# Altium PCB main.PcbDoc
Units mm, origin at the board's own origin, x right, y up, seen from the top; angles counter-clockwise.
Board outline 138 x 136 mm, 2 copper layers (Top Layer, Bottom Layer); 32 components, 34 nets, 230 pads, 21 vias.
Unrouted connection lines stored in the file: 1.
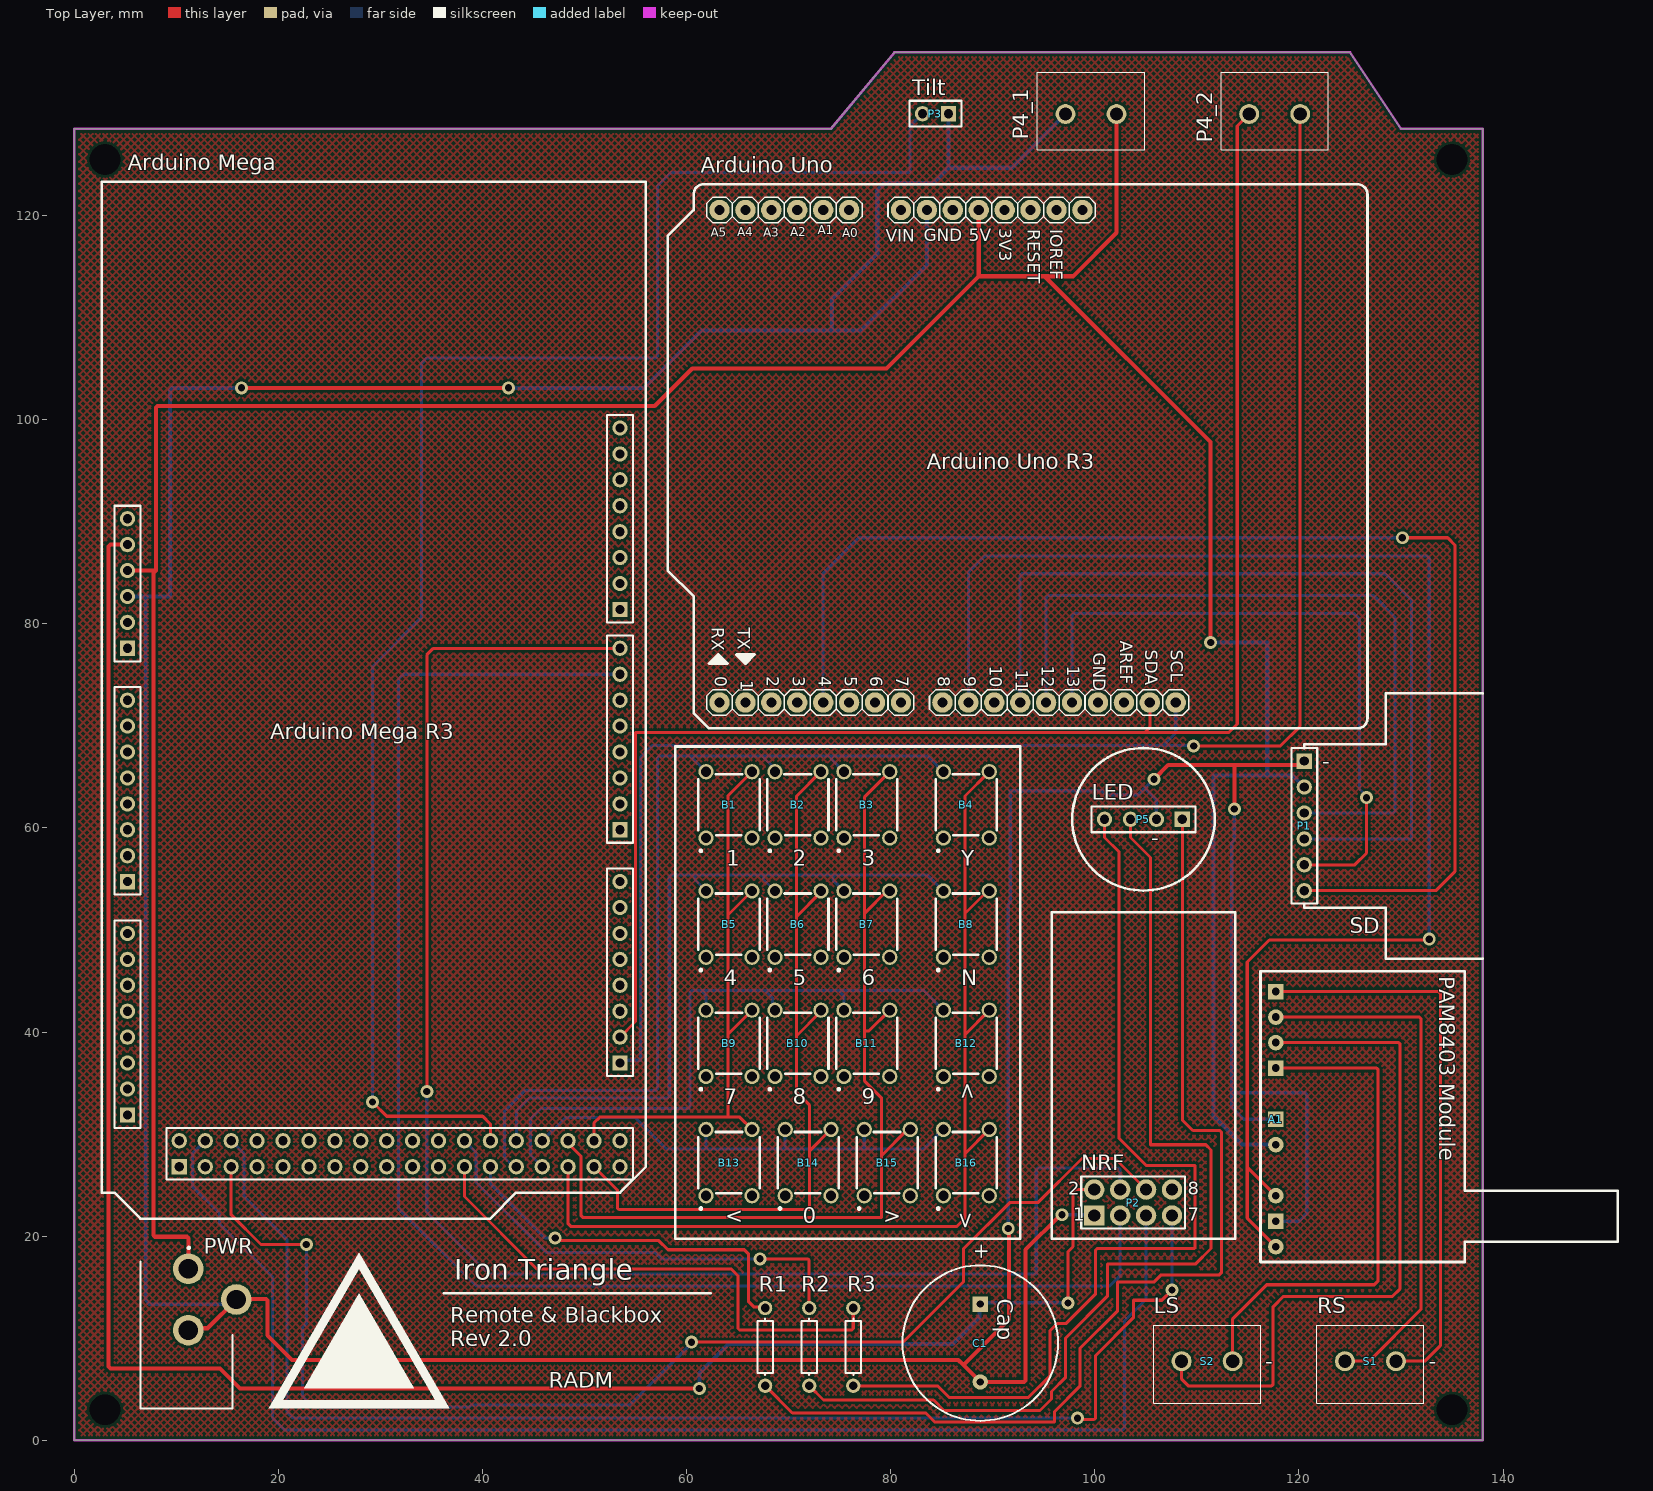
[diagram p0: Top Layer view]
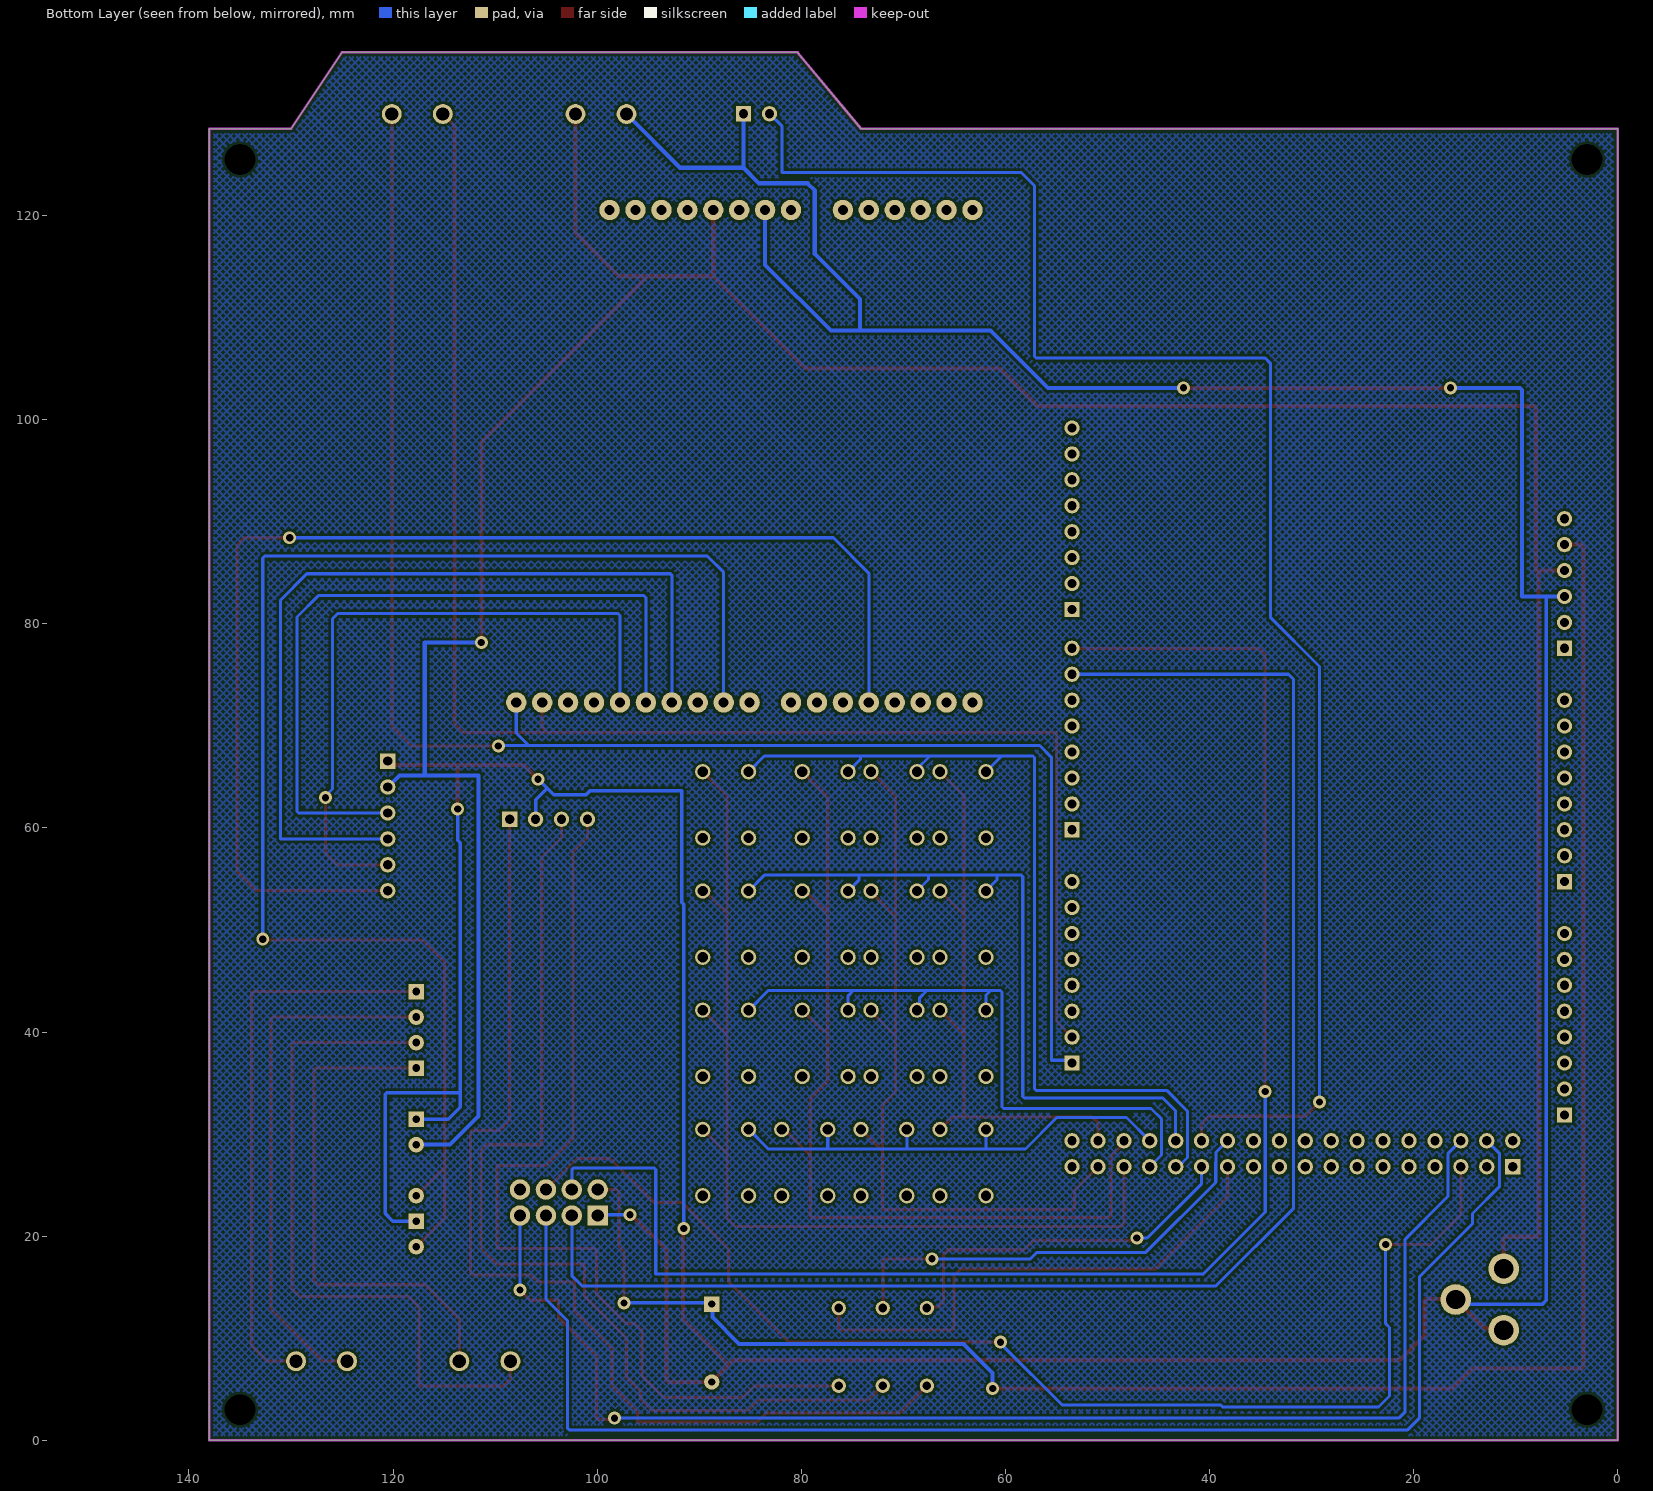
[diagram p1: Bottom Layer view, seen from below]

## Layer stack, top to bottom
Top Solder: solder mask 0.0102, Solder Resist, Dk 3.5
Top Layer: signal copper 0.0356
Dielectric 1: dielectric 0.32, FR-4, Dk 4.8
Bottom Layer: signal copper 0.0356
Bottom Solder: solder mask 0.0102, Solder Resist, Dk 3.5

## Board outline
0,0 0,128.5 74.115,128.5 80.363,136 125,136 130,128.5 138,128.5 138,0

## Design rules (kind name [scope] priority, off if disabled: settings)
Clearance [All] p1: gap=0.254 ignorepadtopadclearanceinfootprint=FALSE except(0: Arc-Hole Track-Hole SMDPad-Hole THPad-Hole Via-Hole Fill-Hole Poly-Hole Region-Hole Text-Hole)
PolygonConnect [All] p1: connectstyle=Relief reliefconductorwidth=0.254 reliefentries=4 polygonreliefangle="90 Angle" airgapwidth=0.254
RoutingVias [All] p1: holewidth=0.711 width=1.27 viastyle="Through Hole" minholewidth=0.711 minwidth=1.27 maxholewidth=0.711 maxwidth=1.27
SolderMaskExpansion [All] p1: expansion=0.102 istentingtop=FALSE
Width [All] p1: maxlimit=0.4 minlimit=0.254 preferedwidth=0.3
30 further rules are at their usual default settings.

## Components (designator, comment, footprint, x,y, rotation, side; value= is the part's Value field where it differs from the comment)
A1 "Speaker Amp" "HiLetgo PAM8403 Amp Module" 116.229,45.963 r270 top
"Arduino Mega" "ARDUINO MEGA" "ARDUINO MEGA" 30.607,69.98 r270 top
"Arduino Uno" "ARDUINO UNO" "ARDUINO UNO" 90.66,96.55 r180 top
B1 "Pushbutton" FSM4JH 64.151,62.262 r90 top
B2 "Pushbutton" FSM4JH 70.903,62.262 r90 top
B3 "Pushbutton" FSM4JH 77.655,62.262 r90 top
B4 "Pushbutton" FSM4JH 87.407,62.262 r90 top
B5 "Pushbutton" FSM4JH 64.151,50.578 r90 top
B6 "Pushbutton" FSM4JH 70.903,50.578 r90 top
B7 "Pushbutton" FSM4JH 77.655,50.578 r90 top
B8 "Pushbutton" FSM4JH 87.407,50.578 r90 top
B9 "Pushbutton" FSM4JH 64.151,38.894 r90 top
B10 "Pushbutton" FSM4JH 70.903,38.894 r90 top
B11 "Pushbutton" FSM4JH 77.655,38.894 r90 top
B12 "Pushbutton" FSM4JH 87.407,38.894 r90 top
B13 "Pushbutton" FSM4JH 64.151,27.21 r90 top
B14 "Pushbutton" FSM4JH 71.903,27.21 r90 top
B15 "Pushbutton" FSM4JH 79.655,27.21 r90 top
B16 "Pushbutton" FSM4JH 87.407,27.21 r90 top
C1 "" RB7.6-15 88.773,9.525 r90 top value=10uF
P1 "SD" HDR1X6 120.523,66.548 r270 top
P2 "NRF24L01" HDR2X4 99.937,22.022 r0 top
P3 "Tilt" HDR1X2 85.65,129.985 r180 top
P4_1 "LCD 1" TB00250002BE 97.122,129.95 r0 top
P4_2 "LCD 2" TB00250002BE 115.122,129.95 r0 top
P5 "RGB LED" HDR1X4 108.57,60.849 r180 top
PWR "DC PWR" PJ-102AH 15.476,13.795 r180 top
R1 "" AXIAL-0.3 67.691,9.144 r90 top value=230
R2 "" AXIAL-0.3 72.009,9.144 r270 top value=230
R3 "" AXIAL-0.3 76.327,9.144 r90 top value=230
S1 "Speaker Left" TB00250002BE 129.5,7.747 r180 top
S2 "Speaker Right" TB00250002BE 113.5,7.747 r180 top

## Footprints (in the part's own frame and the unit in brackets; to place one, negate y for a bottom-side part, rotate by r counter-clockwise, add the part's x,y. Pads: shape width x height; smd on the part's side, far side on the other; paste and mask are expansions set on the pad)
"ARDUINO MEGA" [mm] "Arduino Mega 2560"
  rect 1.5x1.5 hole 0.9: 0(10.16,22.86) 8(-11.43,22.86) 21(33.02,22.86) 59(-7.62,-25.4) 67(15.24,-25.4) 75(38.1,-25.4) 79(43.18,-20.32)
  round 1.5 hole 0.9: 1(7.62,22.86) 2(5.08,22.86) 3(2.54,22.86) 4(0,22.86) 5(-2.54,22.86) 6(-5.08,22.86) 7(-7.62,22.86) 9(-13.97,22.86) 10(-16.51,22.86) 11(-19.05,22.86) 12(-21.59,22.86) 13(-24.13,22.86) 14(15.24,22.86) 15(17.78,22.86) 16(20.32,22.86) 17(22.86,22.86) 18(25.4,22.86) 19(27.94,22.86) 20(30.48,22.86) 22(40.64,20.32) 23(43.18,20.32) 24(40.64,17.78) 25(43.18,17.78) 26(40.64,15.24) 27(43.18,15.24) 28(40.64,12.7) 29(43.18,12.7) 30(40.64,10.16) 31(43.18,10.16) 32(40.64,7.62) 33(43.18,7.62) 34(40.64,5.08) 35(43.18,5.08) 36(40.64,2.54) 37(43.18,2.54) 38(40.64,0) 39(43.18,0) 40(40.64,-2.54) 41(43.18,-2.54) 42(40.64,-5.08) 43(43.18,-5.08) 44(40.64,-7.62) 45(43.18,-7.62) 46(40.64,-10.16) 47(43.18,-10.16) 48(40.64,-12.7) 49(43.18,-12.7) 50(40.64,-15.24) 51(43.18,-15.24) 52(40.64,-17.78) 53(43.18,-17.78) 54(-20.32,-25.4) 55(-17.78,-25.4) 56(-15.24,-25.4) 57(-12.7,-25.4) 58(-10.16,-25.4) 60(-2.54,-25.4) 61(0,-25.4) 62(2.54,-25.4) 63(5.08,-25.4) 64(7.62,-25.4) 65(10.16,-25.4) 66(12.7,-25.4) 68(20.32,-25.4) 69(22.86,-25.4) 70(25.4,-25.4) 71(27.94,-25.4) 72(30.48,-25.4) 73(33.02,-25.4) 74(35.56,-25.4) 76(-26.67,22.86) 77(-29.21,22.86) 78(40.64,-20.32) 80(43.18,22.86) 81(40.64,22.86)
  silkscreen extent -53.34,-27.94 48.26,25.4
"ARDUINO UNO" [mm]
  round 2 hole 1: 0(27.44,24.26) 1(24.9,24.26) 2(22.36,24.26) 3(19.82,24.26) 3.3V(-0.5,-24) 4(17.28,24.26) 5(14.74,24.26) 5V(2.04,-24) 6(12.2,24.26) 7(9.66,24.26) 8(5.596,24.26) 9(3.056,24.26) 10(0.516,24.26) 11(-2.024,24.26) 12(-4.564,24.26) 13(-7.104,24.26) A0(14.74,-24) A1(17.28,-24) A2(19.82,-24) A3(22.36,-24) A4(24.9,-24) A5(27.44,-24) AREF(-12.184,24.26) GND1(7.12,-24) GND2(4.58,-24) GND3(-9.644,24.26) IOREF(-5.58,-24) NC(-8.12,-24) RST(-3.04,-24) SCL(-17.264,24.26) SDA(-14.724,24.26) Vin(9.66,-24)
  silkscreen extent -36.06,-26.54 32.52,26.8
AXIAL-0.3 [mm] "Axial Device, Thru-Hole; 2 Leads; 0.3 in Pin Spacing"
  round 1.4 hole 0.85: 1(-3.81,0) 2(3.81,0)
  silkscreen extent -2.77,-0.76 2.77,0.76
FSM4JH [mm]
  round 1.5 hole 1: 1(-3.25,2.25) 2(3.25,2.25) 3(-3.25,-2.25) 4(3.25,-2.25)
  silkscreen extent -4.6,-3 3,3, body extent -3.82,-3 3.98,3, height 7.61
HDR1X2 [mm] "Connector; Header; 2 Position"
  rect 1.5x1.5 hole 0.9: 1(0,0)
  round 1.5 hole 0.9: 2(2.54,0)
  silkscreen extent -1.27,-1.27 3.81,1.27
HDR1X4 [mm] "Connector; Header; 4 Position"
  rect 1.5x1.5 hole 0.9: 1(0,0)
  round 1.5 hole 0.9: 2(2.54,0) 3(5.08,0) 4(7.62,0)
  silkscreen extent -1.27,-1.27 8.89,1.27
HDR1X6 [mm] "Connector; Header; 6 Position"
  rect 1.5x1.5 hole 0.9: 1(0,0)
  round 1.5 hole 0.9: 2(2.54,0) 3(5.08,0) 4(7.62,0) 5(10.16,0) 6(12.7,0)
  silkscreen extent -1.27,-1.27 13.97,1.27
HDR2X4 [mm] "Connector; Header; 4x2 Position"
  rect 2x2 hole 1.2: 1(0,0)
  round 2 hole 1.2: 2(0,2.54) 3(2.54,0) 4(2.54,2.54) 5(5.08,0) 6(5.08,2.54) 7(7.62,0) 8(7.62,2.54)
  silkscreen extent -1.27,-1.27 8.89,3.81
"HiLetgo PAM8403 Amp Module" [mil] "https://www.amazon.com/dp/B01DKAI51M?psc=1&smid=A30QSGOJR8LMXA&ref_=chk_typ_imgToDp"
  rect 60x60 hole 30: 1(78.74,59.06) 4(374.01,59.06) 5(570.87,59.06) 8(964.57,59.06)
  round 60 hole 30: 2(177.16,59.06) 3(275.59,59.06) 6(669.29,59.06) 7(866.14,59.06) 9(1062.99,59.06)
  silkscreen extent 0,0 1122,1378
PJ-102AH [mm]
  round 3 hole 1.9: 1(4.3,-3) 2(4.3,3) 3(-0.4,0)
  silkscreen extent 0,-5.17 9,10.7, body extent -0.68,-3.7 8.72,10.7, height 11.04
RB7.6-15 [mm] "Polarized Capacitor (Radial); 2 Leads"
  rect 1.5x1.5 hole 0.7: 1(3.81,0)
  round 1.5 hole 0.7: 2(-3.81,0)
  silkscreen extent -7.62,-7.62 7.62,7.62
TB00250002BE [mm]
  round 1.95 hole 1.3: 1(0,0) 2(5,0)
  silkscreen extent -2.75,-3.5 7.75,4.1, body extent -2.51,-4.08 7.99,3.52, height 9.99

## Part data
A1: library part "HiLetgo PAM8403 Module", "https://www.amazon.com/dp/B01DKAI51M?psc=1&smid=A30QSGOJR8LMXA&ref_=chk_typ_imgToDp"
B1 B2 B3 B4 B5 B6 B7 B8 B9 B10 B11 B12 B13 B14 B15 B16: library part FSM2JAH, "Tactile Pushbutton", Manufacturer_Name="TE Connectivity", Mouser Part Number=506-FSM2JAH, Datasheet Link=http://www.te.com/commerce/DocumentDelivery/DDEController?Action=showdoc&DocId=Customer+Drawing%7F1825910%7FC9%7Fpdf%7FEnglish%7FENG_CD_1825910_C9.pdf%7F1825910-3, Manufacturer_Part_Number=FSM2JAH, Mouser Price/Stock=https://www.mouser.co.uk/ProductDetail/TE-Connectivity-PB/FSM2JAH?qs=Of7OaoM7rsH02ckr%252BGLHNA%3D%3D
C1: library part "Cap Pol1", "Polarized Capacitor (Radial)", LatestRevisionDate=17-Jul-2002, LatestRevisionNote="Re-released for DXP Platform.", PackageDescription="Polarized Capacitor (Radial); 2 Leads", PackageReference=RB7.6-15, Published=8-Jun-2000, Publisher="Altium Limited"
P1: library part "Header 6", "Header, 6-Pin", LatestRevisionDate=17-Jul-2002, LatestRevisionNote="Re-released for DXP Platform.", Publisher="Altium Limited"
P2: library part "Header 4X2", "Header, 4-Pin, Dual row", LatestRevisionDate=17-Jul-2002, LatestRevisionNote="Re-released for DXP Platform.", Publisher="Altium Limited"
P3: library part "Header 2", "Header, 2-Pin", LatestRevisionDate=17-Jul-2002, LatestRevisionNote="Re-released for DXP Platform.", Publisher="Altium Limited"
P4_1 P4_2 S1 S2: library part TB002-500-02BE, "Connector", Manufacturer_Name="CUI Devices", Mouser Part Number=490-TB002-500-02BE, Arrow Part Number=TB002-500-02BE, Arrow Price/Stock=https://www.arrow.com/en/products/tb002-500-02be/cui-devices?region=nac, Datasheet Link=https://eu.mouser.com/datasheet/2/670/tb002_500-1550579.pdf, Height=10.4mm, Manufacturer_Part_Number=TB002-500-02BE, Mouser Price/Stock=https://www.mouser.co.uk/ProductDetail/CUI-Devices/TB002-500-02BE?qs=vLWxofP3U2x9716kcgva%2Fw%3D%3D
P5: library part "Header 4", "Header, 4-Pin", LatestRevisionDate=17-Jul-2002, LatestRevisionNote="Re-released for DXP Platform.", Publisher="Altium Limited"
PWR: library part PJ-102A, "DC Power Plug", Manufacturer_Name="CUI Devices", Mouser Part Number=490-PJ-102A, Arrow Part Number=PJ-102A, Arrow Price/Stock=https://www.arrow.com/en/products/pj-102a/cui-devices?region=nac, Datasheet Link=https://www.cui.com/product/resource/pj-102a.pdf, Manufacturer_Part_Number=PJ-102A, Mouser Price/Stock=https://www.mouser.co.uk/ProductDetail/CUI-Devices/PJ-102A?qs=WyjlAZoYn50UKjtnxOz%252Bqg%3D%3D
R1 R2 R3: library part Res1, "230ohm", LatestRevisionDate=17-Jul-2002, LatestRevisionNote="Re-released for DXP Platform.", PackageDescription="Axial Device, Thru-Hole; 2 Leads; 0.3 in Pin Spacing", PackageReference=AXIAL-0.3, Published=8-Jun-2000, Publisher="Altium Limited"

## Free pads (board coordinates)
  round 2 hole 3: 18(3,3)
  round 1.524 hole 3: 19(3,125.5) 20(135,125.5) 21(135,3)

## Via types
v1: diameter 1.27, hole 0.711, Top Layer to Bottom Layer, 21 vias

## Nets (pads, with @x,y where several pads share a name; then routed paths per layer and width w, separated by ;. In a path a pad name is that pad's centre, name@x,y a point inside that pad or via, vN(x,y) a via of type N, cw(c..) or ccw(c..) an arc to the next point about the centre after c; other vN are vias at no path point)
+3V3: "Arduino Mega.55" C1.1 P2.2 | length 195.7
  Top Layer w0.3: v1(97.37,13.455) 97.37,18.48 97.858,18.968 97.858,24.318 98.102,24.562 P2.2
  Top Layer w0.4: 5.207,87.76 3.536,87.76 3.36,87.584 3.36,7.211 3.536,7.035 14.275,7.035 16.25,5.06 v1(61.24,5.06) ; v1(97.37,13.455) v1@97.529,13.455
  Bottom Layer w0.3: C1.1@88.7,13.262 C1.1
  Bottom Layer w0.35: C1.1 88.893,13.455 v1(97.37,13.455)
  Bottom Layer w0.4: v1(61.24,5.06) 61.24,6.61 64.08,9.45 86.095,9.45 88.7,12.055 C1.1@88.7,13.262
+5V: "Arduino Mega.56" "Arduino Uno.5V" A1.6 P1.2 P4_1.2 PWR.1 | length 321.1
  Top Layer w0.3: 7.979,85.22 8.001,85.242
  Top Layer w0.4: 5.207,85.22 7.979,85.22 7.747,84.988 7.747,20.088 7.896,19.939 11.027,19.939 11.176,19.79 PWR.1 ; 8.001,85.242 8.001,101.197 8.15,101.346 56.874,101.346 60.548,105.02 79.585,105.02 88.62,114.055 ; 88.62,120.55 88.62,114.055 ; P4_1.2 102.122,118.322 97.855,114.055 95.09,114.055 ; v1(111.345,78.165) 111.345,97.8 95.09,114.055 ; 88.62,114.055 95.09,114.055
  Bottom Layer w0.4: v1(111.345,78.165) 116.895,78.165 116.895,65.151 ; A1.6 114.42,28.963 111.633,31.75 111.633,65.151 116.895,65.151 ; P1.2 119.38,65.151 116.895,65.151
column1: "Arduino Mega.22" B1.4 B5.4 B9.4 B13.4 | length 59.4
  Top Layer w0.3: 50.927,29.34 50.927,31.102 51.485,31.66 64.045,31.66 ; B13.4 65.201,31.66 64.045,31.66 ; B9.4 64.117,39.86 64.045,39.86 ; B5.4 64.045,51.472 ; B1.4 64.045,63.156 64.045,51.472 ; 64.045,31.66 64.045,39.86 ; 64.045,39.86 64.045,51.472
column2: "Arduino Mega.23" B2.4 B6.4 B10.4 B14.4 | length 78.3
  Top Layer w0.3: 50.927,26.8 53.213,24.514 53.213,22.755 53.362,22.606 72.025,22.606 72.025,28.332 ; B10.4 73.153,42.008 70.76,39.615 ; B6.4 73.153,53.703 70.76,51.31 ; B2.4 70.76,63.119 70.76,51.31 ; B14.4 72.025,28.332 ; 70.76,39.615 70.76,51.31 ; 70.76,39.615 70.76,34.13 72.025,32.865 72.025,28.332
column3: "Arduino Mega.24" B3.4 B7.4 B11.4 B15.4 | length 93.3
  Top Layer w0.3: 48.387,29.34 48.387,29.083 49.657,27.813 49.657,21.993 49.806,21.844 79.11,21.844 79.11,27.895 ; B11.4 77.876,40.115 77.445,40.115 ; B7.4 79.618,53.828 77.445,51.655 ; B3.4 77.445,63.052 77.445,51.655 ; B15.4 81.675,30.46 79.11,27.895 ; 77.445,40.115 77.445,51.655 ; 77.445,40.115 77.445,35.185 79.11,33.52 79.11,27.895
column4: "Arduino Mega.25" B4.4 B8.4 B12.4 B16.4 | length 99.7
  Top Layer w0.3: 48.387,26.8 48.387,21.209 48.641,20.955 86.487,20.955 87.271,21.739 87.271,28.105 ; B16.4 87.302,28.105 87.271,28.105 ; B12.4 89.657,42.121 87.271,39.735 ; B8.4 89.479,53.828 87.271,51.62 ; B4.4 87.271,63.126 87.271,51.62 ; 87.271,28.105 87.271,39.735 ; 87.271,39.735 87.271,51.62
GND: "Arduino Mega.57" "Arduino Mega.58" "Arduino Uno.GND1" A1.5 A1.8 C1.2 P1.1 P2.1 P3.1 P4_1.1 P5.2 PWR.2 PWR.3 | length 491.9
  Top Layer w0.3: PWR.2 PWR.2@11.357,10.976 ; PWR.3 PWR.3@15.924,13.843
  Top Layer w0.4: PWR.2@11.357,10.976 13.057,10.976 PWR.3 ; PWR.3@15.924,13.843 18.774,13.843 18.923,13.694 18.923,10.287 21.336,7.874 86.614,7.874 87.122,7.366 ; v1(16.383,103.124) v1(42.545,103.124) ; v1(91.515,20.76) 91.567,20.708 91.567,11.811 87.122,7.366 ; v1@96.571,22.022 93.218,18.669 93.218,5.864 93.069,5.715 C1.2 87.122,7.366 ; v1(105.791,64.77) 107.188,66.167 113.665,66.167 ; v1(113.665,61.849) 113.665,66.167 ; P1.1 120.142,66.167 113.665,66.167
  Bottom Layer w0.3: 6.836,82.68 6.839,82.677 ; PWR.3@15.416,13.335 PWR.3 ; 91.686,52.697 91.694,52.705 ; P2.1@99.861,22.098 P2.1
  Bottom Layer w0.35: 6.985,82.531 6.985,13.716 7.366,13.335 PWR.3@15.416,13.335 ; v1(91.515,20.76) 91.515,52.526 91.686,52.697 ; 91.694,52.705 91.694,63.627 100.712,63.627 101.093,63.247 104.268,63.247 104.902,63.881 ; v1(96.774,22.098) P2.1@99.861,22.098 ; v1(105.791,64.77) 104.902,63.881 ; P5.2 106.03,62.753 104.902,63.881 ; v1(113.665,61.849) 113.665,58.801 113.411,58.547 113.411,34.036 ; A1.8 120.015,21.463 120.777,22.225 120.777,33.887 120.628,34.036 113.411,34.036 ; A1.5 114.587,31.463 113.411,32.639 113.411,34.036
  Bottom Layer w0.4: 5.207,82.68 6.836,82.68 ; 6.839,82.677 9.385,82.677 9.385,102.919 9.59,103.124 v1(16.383,103.124) ; v1(42.545,103.124) 55.824,103.124 61.44,108.74 74.23,108.74 ; 83.54,120.55 83.54,115.18 77.1,108.74 74.23,108.74 ; P3.1 85.65,124.69 ; P4_1.1 91.862,124.69 85.65,124.69 ; 74.23,108.74 74.23,111.81 78.675,116.255 78.675,122.48 79.365,123.17 84.13,123.17 85.65,124.69
L_Out_+: A1.3 S2.2 | length 68.1
  Top Layer w0.3: S2.2 108.5,5.982 109.148,5.334 117.326,5.334 117.475,5.483 117.475,13.081 118.491,14.097 129.159,14.097 129.921,14.859 129.921,38.814 129.772,38.963 A1.3
L_Out_-: A1.4 S2.1 | length 50.7
  Top Layer w0.3: S2.1 113.5,11.9 116.84,15.24 127.381,15.24 127.762,15.621 127.762,36.314 127.613,36.463 A1.4
NetP5_1: P5.1 R1.1 | length 104.2
  Top Layer w0.3: R1.1 70.358,2.667 83.439,2.667 84.328,1.778 96.066,1.778 96.066,2.823 98.529,5.286 98.529,8.982 102.235,12.688 102.235,15.496 105.782,15.496 106.491,16.206 112.201,16.206 112.395,16.4 112.395,30.204 112.246,30.353 109.601,30.353 108.57,31.384 P5.1
NetP5_3: P5.3 R2.2 | length 100
  Top Layer w0.3: R2.2 73.406,3.937 84.201,3.937 85.217,2.921 94.632,2.921 95.758,4.047 95.758,4.779 97.14,6.161 97.14,10.018 101.219,14.097 101.219,17.252 109.835,17.252 111.379,18.796 111.379,28.448 110.871,28.956 105.445,28.956 105.445,57.104 103.49,59.059 P5.3
NetP5_4: P5.4 R3.1 | length 93.6
  Top Layer w0.3: R3.1 84.582,5.334 85.725,4.191 93.472,4.191 95.616,6.335 95.616,10.752 96.294,11.43 97.155,11.43 100.076,14.351 100.076,18.647 100.225,18.796 109.758,18.796 109.822,18.86 109.822,26.924 105.029,26.924 102.385,29.568 102.385,57.635 100.95,59.07 P5.4
NRF_CE: "Arduino Mega.6" P2.3 | length 154
  Bottom Layer w0.3: 53.467,75.06 32.261,75.06 31.75,74.549 31.761,74.538 31.761,26.281 31.75,26.27 31.75,22.733 39.37,15.113 101.473,15.113 102.477,16.117 P2.3
NRF_CSN: "Arduino Mega.7" P2.4 | length 156.6
  Top Layer w0.3: v1(34.544,34.163) 34.544,76.962 35.182,77.6 53.467,77.6
  Bottom Layer w0.3: v1(34.544,34.163) 34.533,34.152 34.533,22.363 40.64,16.256 40.688,16.304 94.257,16.304 94.257,26.516 94.433,26.692 102.301,26.692 102.477,26.516 P2.4
NRF_MISO: "Arduino Mega.50" P2.7 | length 132.8
  Top Layer w0.3: v1@98.425,2.032 99.927,2.032 100.076,2.181 100.076,8.299 103.772,11.995 103.772,13.716 106.553,13.716 v1(107.557,14.72)
  Bottom Layer w0.3: 15.367,29.34 16.637,28.07 16.637,23.876 20.828,19.685 20.828,2.794 21.463,2.159 v1(98.298,2.159) ; v1(107.557,14.72) P2.7
NRF_MOSI: "Arduino Mega.51" P2.6 | length 124.3
  Top Layer w0.3: 15.367,26.8 15.367,22.098 18.288,19.177 v1(22.733,19.177) ; v1(60.48,9.61) 81.205,9.61 87.145,15.55 87.145,18.785 91.645,23.285 94.415,23.285 98.74,27.61 101.969,27.61 P2.6
  Bottom Layer w0.3: v1(22.733,19.177) 22.733,11.43 22.352,11.049 22.352,4.343 23.44,3.255 38.709,3.255 38.919,3.465 54.45,3.465 v1@60.305,9.32
NRF_SCK: "Arduino Mega.52" P2.5 | length 136.7
  Bottom Layer w0.3: 12.827,29.34 12.74,29.34 12.74,29.253 11.56,28.073 11.56,24.889 14.224,22.225 14.224,21.209 19.431,16.002 19.431,2.159 20.574,1.016 102.74,1.016 102.916,1.192 102.916,11.729 105.017,13.83 P2.5
R_Out_+: A1.2 S1.2 | length 52.3
  Top Layer w0.3: A1.2 131.804,41.463 131.953,41.314 131.953,12.827 126.873,7.747 S1.2
R_Out_-: A1.1 S1.1 | length 55.7
  Top Layer w0.3: A1.1 133.709,43.963 133.858,43.814 133.858,9.271 132.334,7.747 S1.1
RGB_BLUE: "Arduino Mega.33" R3.2 | length 51.6
  Top Layer w0.3: 38.227,26.8 38.227,23.876 45.339,16.764 64.389,16.764 65.024,16.129 65.024,10.944 65.173,10.795 76.178,10.795 76.327,10.944 R3.2
RGB_GREEN: "Arduino Mega.32" R2.1 | length 45
  Top Layer w0.3: v1(67.183,17.78) 71.86,17.78 72.009,17.631 R2.1
  Bottom Layer w0.3: 38.227,29.34 39.358,28.209 39.358,27.301 39.381,27.278 39.381,25.308 39.358,25.285 46.228,18.415 56.896,18.415 57.531,17.78 v1(67.183,17.78)
RGB_RED: "Arduino Mega.31" R1.2 | length 36.5
  Top Layer w0.3: v1@46.863,19.558 57.277,19.558 58.166,18.669 65.659,18.669 66.04,18.288 66.04,13.611 66.61,13.041 67.604,13.041 R1.2
  Bottom Layer w0.3: 40.767,26.8 40.767,25.146 46.101,19.812 v1(47.117,19.812)
row1: "Arduino Mega.26" B13.2 B14.2 B15.2 B16.2 | length 48.1
  Bottom Layer w0.3: 45.847,29.34 48.13,31.623 54.952,31.623 58.03,28.545 61.855,28.545 ; B13.2 61.901,28.591 61.855,28.545 ; B14.2 69.653,28.552 69.66,28.545 ; B15.2 77.405,28.585 77.365,28.545 ; B16.2 83.242,28.545 77.365,28.545 ; 61.855,28.545 69.66,28.545 ; 69.66,28.545 77.365,28.545
row2: "Arduino Mega.27" B9.2 B10.2 B11.2 B12.2 | length 64.8
  Bottom Layer w0.3: 45.847,26.8 44.693,27.954 44.693,30.174 44.704,30.185 44.704,31.496 45.72,32.512 60.176,32.512 60.325,32.661 60.325,43.92 60.474,44.069 61.445,44.069 ; B9.2 61.901,43.613 61.445,44.069 ; B10.2 68.423,42.374 68.423,43.322 67.677,44.069 ; B11.2 75.405,43.544 74.88,44.069 ; B12.2 83.232,44.069 74.88,44.069 ; 61.445,44.069 67.677,44.069 ; 67.677,44.069 74.88,44.069
row3: "Arduino Mega.28" B5.2 B6.2 B7.2 B8.2 | length 73.6
  Bottom Layer w0.3: 43.307,29.34 43.307,32.258 44.577,33.528 58.144,33.528 58.293,33.677 58.293,55.223 58.442,55.372 60.81,55.372 ; B5.2 60.81,54.919 60.81,55.372 ; B6.2 67.535,54.946 67.535,55.372 ; B7.2 74.355,54.878 74.355,55.372 ; B8.2 83.613,55.372 74.355,55.372 ; 60.81,55.372 67.535,55.372 ; 67.535,55.372 74.355,55.372
row4: "Arduino Mega.29" B1.2 B2.2 B3.2 B4.2 | length 89.5
  Bottom Layer w0.3: 43.307,26.8 43.05,26.8 42.142,27.708 42.142,32.236 44.196,34.29 57.001,34.29 57.15,34.439 57.15,66.907 57.299,67.056 60.357,67.056 ; B1.2 60.357,67.056 ; B2.2 68.653,65.788 67.385,67.056 ; B3.2 74.215,66.702 74.215,67.056 ; B4.2 83.613,67.056 74.215,67.056 ; 60.357,67.056 67.385,67.056 ; 67.385,67.056 74.215,67.056
SCL: "Arduino Mega.21" "Arduino Uno.SCL" P4_2.2 | length 162.6
  Top Layer w0.3: v1(109.68,68.035) 118.18,68.035 120.122,69.977 P4_2.2 P4_2.2@120.122,130.068
  Bottom Layer w0.3: 53.467,36.96 53.74,37.233 55.499,37.233 55.499,66.929 56.642,68.072 106.697,68.072 ; 107.924,72.29 107.924,69.299 106.697,68.072 ; v1(109.68,68.035) 109.643,68.072 106.697,68.072
SD_CS: "Arduino Uno.4" P1.6 | length 123.9
  Top Layer w0.3: P1.6 133.418,53.848 135.28,55.71 135.28,87.73 134.575,88.435 v1(130.13,88.435)
  Bottom Layer w0.3: 73.38,72.29 73.38,84.97 76.845,88.435 v1(130.13,88.435)
SD_MISO: "Arduino Uno.12" P1.3 | length 73.4
  Bottom Layer w0.3: 95.224,72.29 95.224,82.583 95.4,82.759 127.321,82.759 129.413,80.667 129.413,61.617 129.264,61.468 P1.3
SD_MOSI: "Arduino Uno.11" P1.4 | length 85.8
  Bottom Layer w0.3: 92.684,72.29 92.684,84.761 92.833,84.91 128.44,84.91 131.015,82.335 131.015,58.928 P1.4
SD_SCK: "Arduino Uno.13" P1.5 | length 66.8
  Top Layer w0.3: P1.5 125.476,56.388 126.619,57.531 126.615,57.535 v1(126.615,62.97)
  Bottom Layer w0.3: 97.764,72.29 97.764,80.815 97.94,80.991 125.433,80.991 125.931,80.493 125.931,63.821 126.615,63.137 v1(126.615,62.97)
SDA: "Arduino Mega.20" "Arduino Uno.SDA" P4_2.1 | length 153.2
  Top Layer w0.3: 53.467,39.5 54.991,41.024 54.991,69.342 104.872,69.342 ; 105.384,72.29 105.384,69.854 104.872,69.342 ; P4_2.1 113.951,128.779 113.951,70.189 113.104,69.342 104.872,69.342
SPEAKER: "Arduino Uno.9" A1.7 A1.9 | length 147.9
  Top Layer w0.3: A1.9 114.935,21.757 114.935,26.757 ; A1.7 114.935,26.757 ; v1@132.842,49.171 v1(132.768,49.096) 132.693,49.022 117.094,49.022 114.935,46.863 114.935,26.757
  Bottom Layer w0.3: 87.604,72.29 87.604,85.049 89.182,86.627 132.592,86.627 132.768,86.452 v1(132.768,49.096)
Tilt: "Arduino Mega.30" P3.2 | length 160.2
  Top Layer w0.3: v1(29.21,33.147) 30.607,31.75 40.005,31.75 40.767,30.988 40.767,29.34
  Bottom Layer w0.3: v1(29.21,33.147) 29.21,75.819 34.036,80.645 34.036,105.537 34.544,106.045 57.001,106.045 57.15,106.194 57.15,122.936 58.42,124.206 81.87,124.206 81.87,128.745 P3.2
pads on no net: "Arduino Mega.0" "Arduino Mega.1" "Arduino Mega.2" "Arduino Mega.3" "Arduino Mega.4" "Arduino Mega.5" "Arduino Mega.8" "Arduino Mega.9" "Arduino Mega.10" "Arduino Mega.11" "Arduino Mega.12" "Arduino Mega.13" "Arduino Mega.14" "Arduino Mega.15" "Arduino Mega.16" "Arduino Mega.17" "Arduino Mega.18" "Arduino Mega.19" "Arduino Mega.34" "Arduino Mega.35" "Arduino Mega.36" "Arduino Mega.37" "Arduino Mega.38" "Arduino Mega.39" "Arduino Mega.40" "Arduino Mega.41" "Arduino Mega.42" "Arduino Mega.43" "Arduino Mega.44" "Arduino Mega.45" "Arduino Mega.46" "Arduino Mega.47" "Arduino Mega.48" "Arduino Mega.49" "Arduino Mega.53" "Arduino Mega.54" "Arduino Mega.59" "Arduino Mega.60" "Arduino Mega.61" "Arduino Mega.62" "Arduino Mega.63" "Arduino Mega.64" "Arduino Mega.65" "Arduino Mega.66" "Arduino Mega.67" "Arduino Mega.68" "Arduino Mega.69" "Arduino Mega.70" "Arduino Mega.71" "Arduino Mega.72" "Arduino Mega.73" "Arduino Mega.74" "Arduino Mega.75" "Arduino Mega.76" "Arduino Mega.77" "Arduino Mega.78" "Arduino Mega.79" "Arduino Mega.80" "Arduino Mega.81" "Arduino Uno.0" "Arduino Uno.1" "Arduino Uno.2" "Arduino Uno.3" "Arduino Uno.3.3V" "Arduino Uno.5" "Arduino Uno.6" "Arduino Uno.7" "Arduino Uno.8" "Arduino Uno.10" "Arduino Uno.A0" "Arduino Uno.A1" "Arduino Uno.A2" "Arduino Uno.A3" "Arduino Uno.A4" "Arduino Uno.A5" "Arduino Uno.AREF" "Arduino Uno.GND2" "Arduino Uno.GND3" "Arduino Uno.IOREF" "Arduino Uno.NC" "Arduino Uno.RST" "Arduino Uno.Vin" B1.1 B1.3 B2.1 B2.3 B3.1 B3.3 B4.1 B4.3 B5.1 B5.3 B6.1 B6.3 B7.1 B7.3 B8.1 B8.3 B9.1 B9.3 B10.1 B10.3 B11.1 B11.3 B12.1 B12.3 B13.1 B13.3 B14.1 B14.3 B15.1 B15.3 B16.1 B16.3 P2.8

## Polygon pours and split planes (outlines as drawn)
no net on Bottom Layer "NONET_L02_P000" (hatched 45Degree grid 0.508 track 0.203, pour order 0): 0,0 138,0 138,128.5 130,128.5 128.785,130.323 125,136 80.4,136 79.698,135.202 74.115,128.5 0,128.5
no net on Top Layer "NONET_L01_P001" (hatched 45Degree grid 0.508 track 0.203, pour order 1): 0,0 138,0 138,128.5 130,128.5 126.623,133.565 125,136 80.363,136 74.833,129.362 74.115,128.5 0,128.5

## Keep-outs
Keep-Out Layer:
  the board outline again, w0.254

## Silkscreen, mask and mechanical layers (free items; w line width, h text height)
Top Overlay:
  drawing of 21 lines, arcs and shapes, not listed
  text "Tilt" at 82.094,131.791 h1.52
  text "-" at 122.301,65.786 h1.52
  text "LED" at 99.695,62.738 h1.52
  text "-" at 105.522,58.293 h1.52
  text "1" at 63.897,56.293 h1.52
  text "2" at 70.395,56.293 h1.52
  text "3" at 77.147,56.293 h1.52
  text "Y" at 86.899,56.293 h1.52
  text "SD" at 124.968,49.657 h1.52
  text "4" at 63.643,44.609 h1.52
  text "5" at 70.395,44.609 h1.52
  text "6" at 77.147,44.609 h1.52
  text "N" at 86.899,44.609 h1.52
  text ">" at 88.169,33.306 h1.52 r90
  text "7" at 63.643,32.925 h1.52
  text "8" at 70.395,32.925 h1.52
  text "9" at 77.147,32.925 h1.52
  text "NRF" at 98.667,26.467 h1.52
  text ">" at 86.645,22.384 h1.52 r270
  text "<" at 63.77,21.241 h1.52
  text "0" at 71.395,21.241 h1.52
  text ">" at 79.274,21.241 h1.52
  text "Iron Triangle" at 37.251,15.717 h2
  text "Cap" at 90.424,13.843 h1.52 r270
  text "LS" at 105.775,12.446 h1.52
  text "RS" at 121.809,12.446 h1.52
  text "Remote & Blackbox / Rev 2.0" at 36.845,9.208 h1.52
  text "-" at 116.697,6.985 h1.52
  text "-" at 132.697,6.985 h1.52
  text "RADM" at 46.492,5.144 h1.52

## Text inside footprints (layer, text, board x,y; h text height)
A1: Top Overlay "PAM8403 Module" at 133.755,45.455 h1.52 r270
"Arduino Mega": Top Overlay "Arduino Mega R3" at 19.177,68.71 h1.52
"Arduino Uno": Top Overlay "Arduino Uno R3" at 83.505,95.13 h1.52; Top Overlay "SDA" at 104.931,77.463 h1.21 r270; Top Overlay "SCL" at 107.46,77.45 h1.21 r270; Top Overlay "0" at 62.773,74.874 h1.21 r270; Top Overlay "1" at 65.313,74.471 h1.21 r270; Top Overlay "2" at 67.853,74.874 h1.21 r270; Top Overlay "3" at 70.393,74.874 h1.21 r270; Top Overlay "4" at 72.933,74.874 h1.21 r270; Top Overlay "5" at 75.473,74.874 h1.21 r270; Top Overlay "6" at 78.013,74.874 h1.21 r270; Top Overlay "7" at 80.553,74.874 h1.21 r270; Top Overlay "8" at 84.617,74.874 h1.21 r270; Top Overlay "9" at 87.157,74.874 h1.21 r270; Top Overlay "10" at 89.697,75.881 h1.21 r270; Top Overlay "11" at 92.237,75.478 h1.21 r270; Top Overlay "12" at 94.777,75.881 h1.21 r270; Top Overlay "13" at 97.317,75.881 h1.21 r270; Top Overlay "RX" at 62.458,79.656 h1.21 r270; Top Overlay "TX" at 64.998,79.631 h1.21 r270; Top Overlay "IOREF" at 95.605,118.645 h1.21 r270; Top Overlay "GND" at 83.25,117.47 h1.21; Top Overlay "VIN" at 79.5,117.42 h1.21; Top Overlay "A5" at 62.365,117.94 h0.86; Top Overlay "A4" at 64.945,117.96 h0.86; Top Overlay "A3" at 67.53,117.92 h0.86; Top Overlay "A2" at 70.135,117.98 h0.86; Top Overlay "A1" at 72.825,118.165 h0.86; Top Overlay "3V3" at 90.652,118.772 h1.21 r270; Top Overlay "RESET" at 93.446,118.645 h1.21 r270; Top Overlay "GND" at 99.832,77.164 h1.21 r270; Top Overlay "AREF" at 102.474,78.347 h1.21 r270; Top Overlay "A0" at 75.24,117.895 h0.86; Top Overlay "5V" at 87.66,117.47 h1.21
C1: Top Overlay "+" at 89.51,17.657 h1.5 r90
P2: Top Overlay "2" at 97.397,24.054 h1.27; Top Overlay "1" at 97.905,21.514 h1.27; Top Overlay "7" at 109.081,21.514 h1.27; Top Overlay "8" at 109.081,24.054 h1.27